# Altium PCB PCB1.PcbDoc
Units mil, origin at the board's own origin, x right, y up, seen from the top; angles counter-clockwise.
Board outline 1968.5 x 3365.35 mil, 2 copper layers (Top Layer, Bottom Layer); 34 components, 44 nets, 152 pads, 34 vias.
Unrouted connection lines stored in the file: 7.
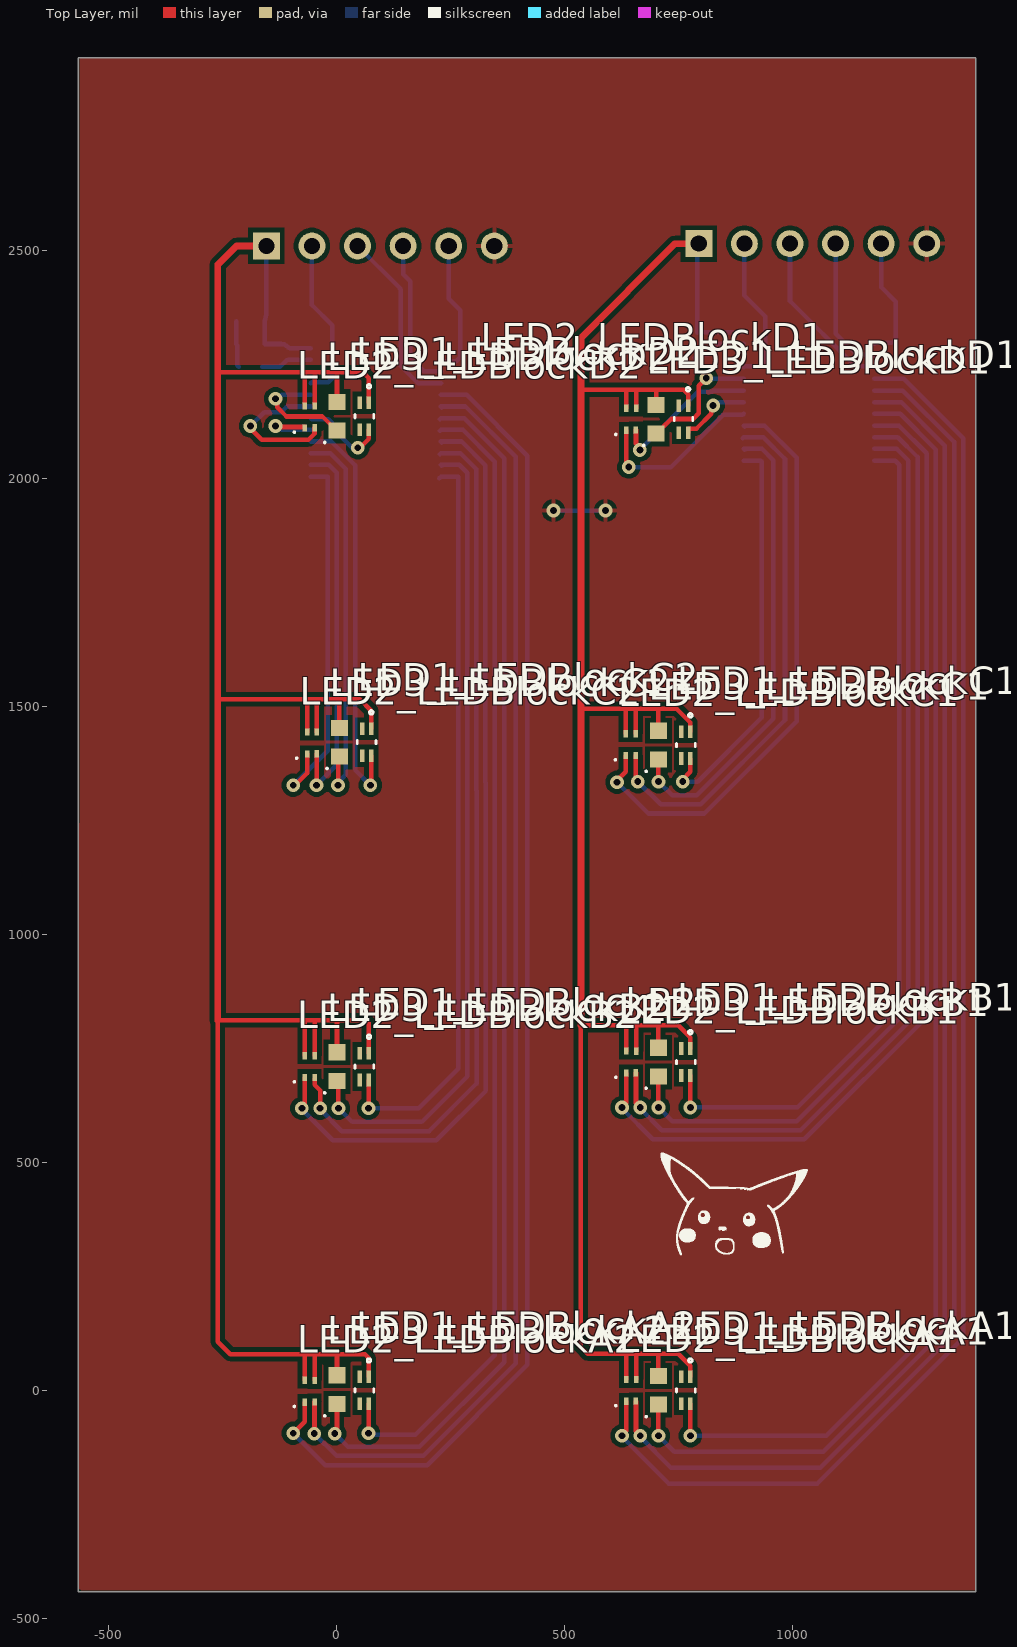
[diagram p0: Top Layer view]
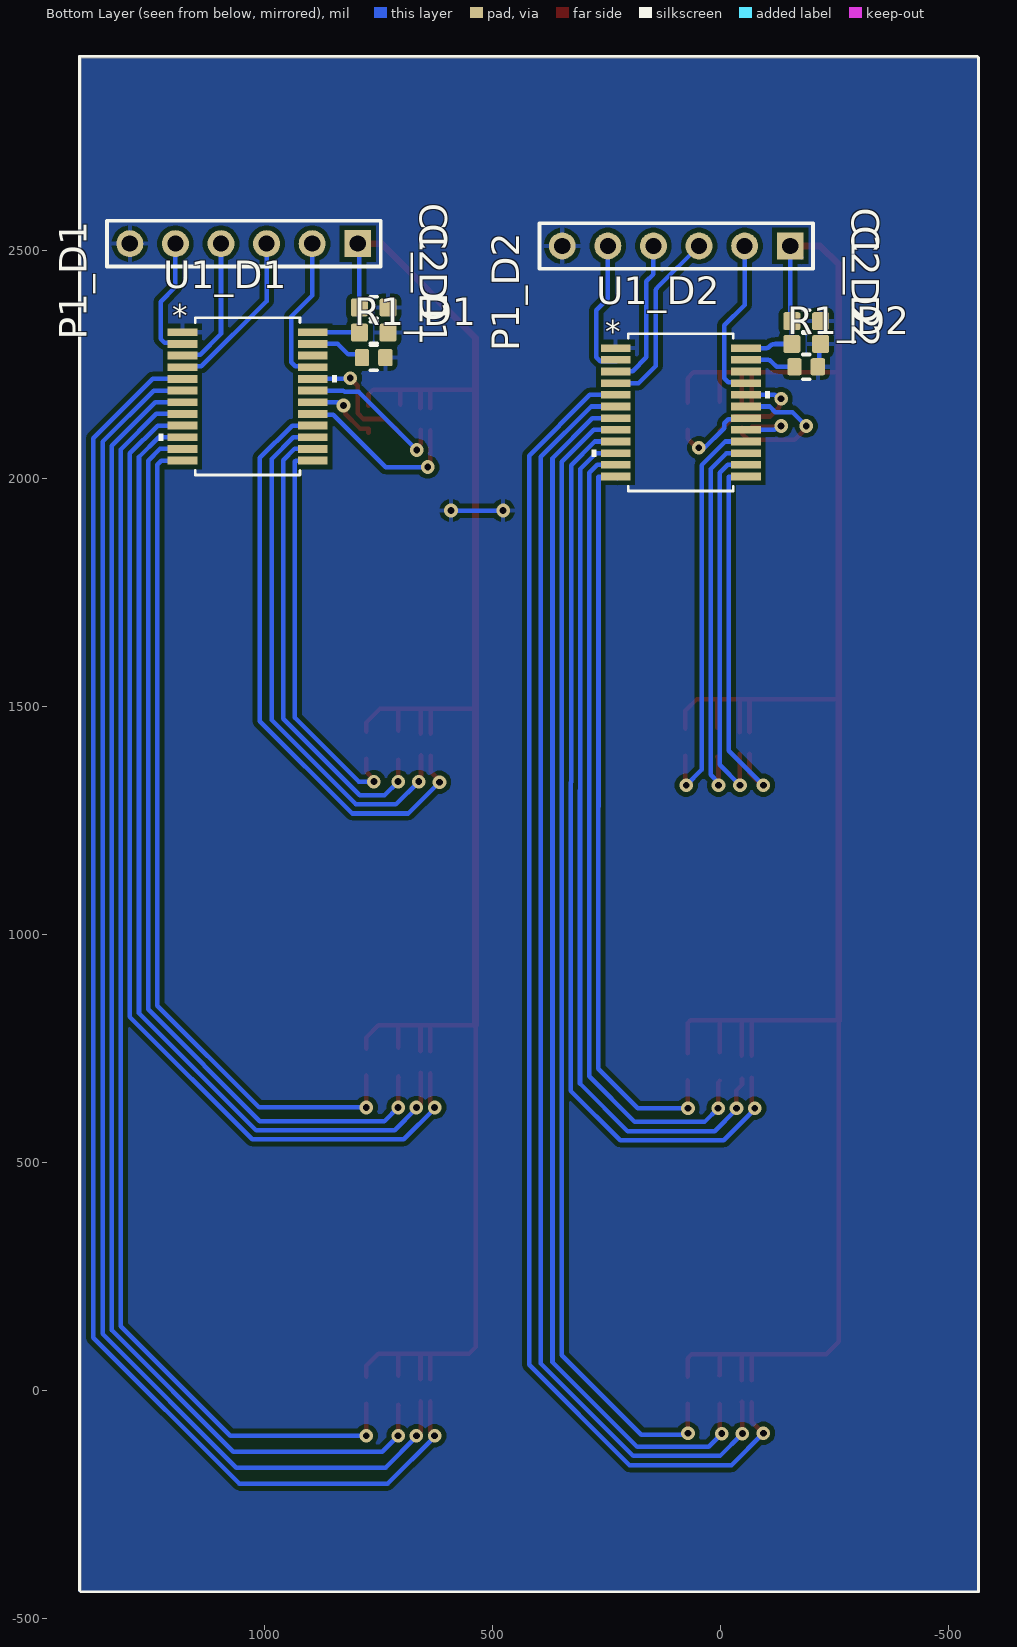
[diagram p1: Bottom Layer view, seen from below]
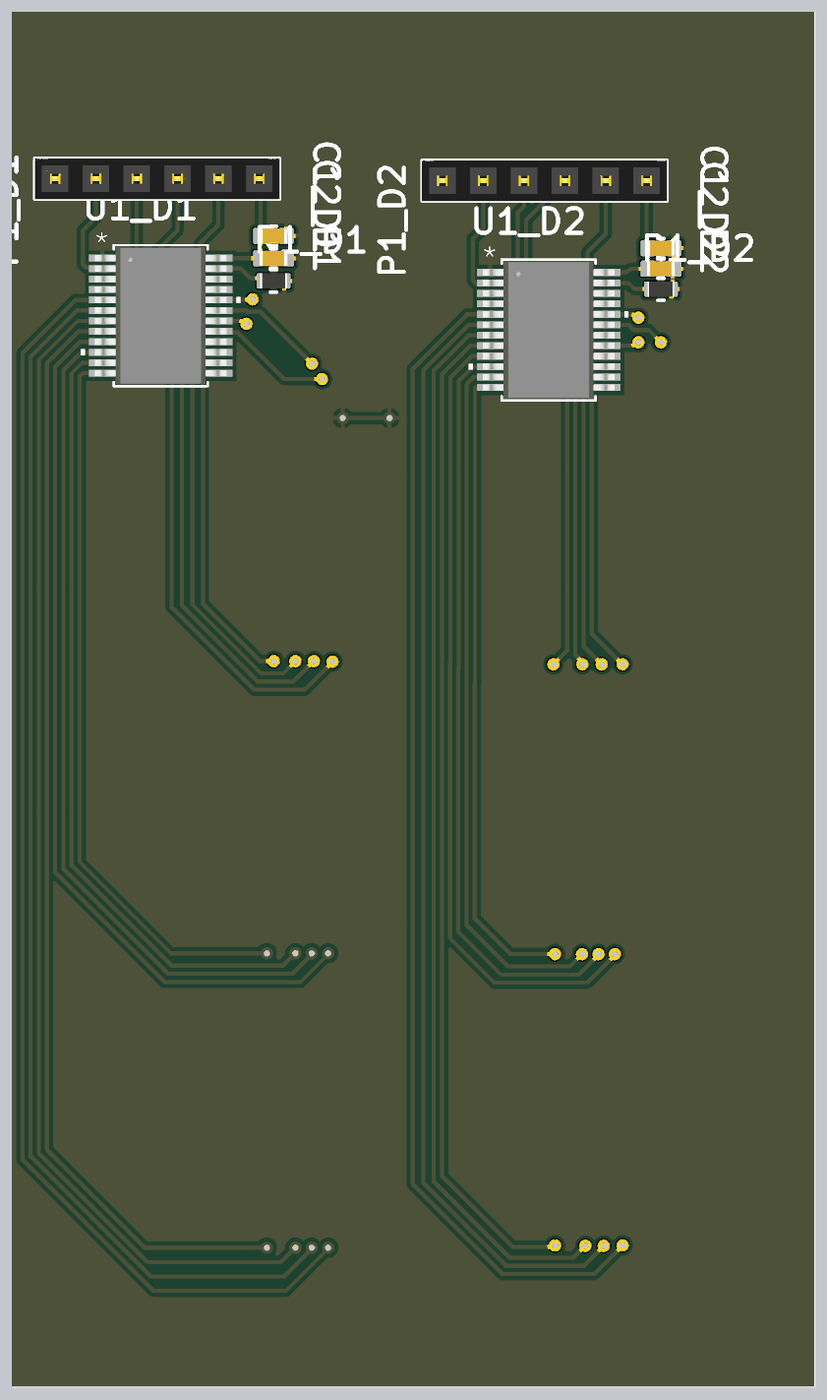
[diagram p2: 3D render of the assembled board from below, using the file's embedded part models]

## Layer stack, top to bottom
Top Solder: solder mask 0.4, Solder Resist, Dk 3.5
Top Layer: signal copper 1.4
Dielectric 1: dielectric 12.6, FR-4, Dk 4.8
Bottom Layer: signal copper 1.4
Bottom Solder: solder mask 0.4, Solder Resist, Dk 3.5

## Board outline
-566.14,-442.52 1402.36,-442.52 1402.36,2922.83 -566.14,2922.83

## Design rules (kind name [scope] priority, off if disabled: settings)
Clearance [All] p1: gap=10 ignorepadtopadclearanceinfootprint=FALSE except(0: Arc-Hole Track-Hole SMDPad-Hole THPad-Hole Via-Hole Fill-Hole Poly-Hole Region-Hole Text-Hole)
PolygonConnect [All] p1: connectstyle=Relief reliefconductorwidth=10 reliefentries=4 polygonreliefangle="90 Angle" airgapwidth=10
RoomDefinition LEDBlockB1 [InComponentClass('LEDBlockB1')] p1: confinementstyle=ConfineIn formatcopy=TRUE lockcomponents=FALSE outline 607.32,-79.45 802.32,-79.45 802.32,80.55 607.32,80.55
RoomDefinition LEDBlockA2 [InComponentClass('LEDBlockA2')] p2: confinementstyle=ConfineIn formatcopy=TRUE lockcomponents=FALSE outline -111.34,-78.46 98.66,-78.46 98.66,81.54 -111.34,81.54
RoomDefinition LEDBlockA1 [InComponentClass('LEDBlockA1')] p3: confinementstyle=ConfineIn formatcopy=TRUE lockcomponents=FALSE outline 607.32,629.21 802.32,629.21 802.32,789.21 607.32,789.21
RoomDefinition LEDBlockB2 [InComponentClass('LEDBlockB2')] p4: confinementstyle=ConfineIn formatcopy=TRUE lockcomponents=FALSE outline -111.34,631.54 98.66,631.54 98.66,791.54 -111.34,791.54
RoomDefinition LEDBlockC2 [InComponentClass('LEDBlockC2')] p5: confinementstyle=ConfineIn formatcopy=TRUE lockcomponents=FALSE outline -106.34,1341.54 103.66,1341.54 103.66,1501.54 -106.34,1501.54
RoomDefinition LEDBlockC1 [InComponentClass('LEDBlockC1')] p6: confinementstyle=ConfineIn formatcopy=TRUE lockcomponents=FALSE outline 607.32,1337.87 802.32,1337.87 802.32,1497.87 607.32,1497.87
RoomDefinition LEDBlockD2 [InComponentClass('LEDBlockD2')] p7: confinementstyle=ConfineIn formatcopy=TRUE lockcomponents=FALSE outline -111.34,2056.54 98.66,2056.54 98.66,2216.54 -111.34,2216.54
RoomDefinition LEDBlockD1 [InComponentClass('LEDBlockD1')] p8: confinementstyle=ConfineIn formatcopy=TRUE lockcomponents=FALSE outline 607.32,2046.54 802.32,2046.54 802.32,2206.54 607.32,2206.54
RoutingVias [All] p1: holewidth=15 width=30 viastyle="Through Hole" minholewidth=6 minwidth=16 maxholewidth=100 maxwidth=100
SolderMaskExpansion [All] p1: expansion=4 istentingtop=FALSE
Width [All] p1: maxlimit=50 minlimit=6 preferedwidth=10 minimp=50.000000 maximp=50.000000 favimp=50.000000
30 further rules are at their usual default settings.

## Classes and differential pairs
component class LEDBlockD2: LED1_LEDBlockD2 LED2_LEDBlockD2 LED3_LEDBlockD2
component class LEDBlockD1: LED1_LEDBlockD1 LED2_LEDBlockD1 LED3_LEDBlockD1
component class LEDBlockC2: LED1_LEDBlockC2 LED2_LEDBlockC2 LED3_LEDBlockC2
component class LEDBlockC1: LED1_LEDBlockC1 LED2_LEDBlockC1 LED3_LEDBlockC1
component class LEDBlockB2: LED1_LEDBlockB2 LED2_LEDBlockB2 LED3_LEDBlockB2
component class LEDBlockA2: LED1_LEDBlockA2 LED2_LEDBlockA2 LED3_LEDBlockA2
channel class LEDBlock: LEDBlockA1 LEDBlockA2 LEDBlockB1 LEDBlockB2 LEDBlockC1 LEDBlockC2 LEDBlockD1 LEDBlockD2
channel class Main: D1 D2
channel class LED: D1 D2
component class D2: C1_D2 C2_D2 P1_D2 R1_D2
component class D1: C1_D1 C2_D1 P1_D1 R1_D1 U1_D1

## Components (designator, comment, footprint, x,y, rotation, side; value= is the part's Value field where it differs from the comment)
C1_D1 "Capacitor" C0603B 760.17,2374.54 r180 bottom value=1u (schematic designator C1)
C1_D2 "Capacitor" C0603B -188.34,2344.54 r180 bottom value=1u (schematic designator C1)
C2_D1 "Capacitor" C0603B 760.17,2319.54 r180 bottom value=0.1u (schematic designator C2)
C2_D2 "Capacitor" C0603B -188.34,2294.54 r180 bottom value=0.1u (schematic designator C2)
LED1_LEDBlockA1 "APHB1608CGKSEKC" APHB1608CGKSEKC_KNB 766.66,-0.46 r270 top (schematic designator LED1)
LED1_LEDBlockA2 "APHB1608CGKSEKC" APHB1608CGKSEKC_KNB 61.66,-0.46 r270 top (schematic designator LED1)
LED1_LEDBlockB1 "APHB1608CGKSEKC" APHB1608CGKSEKC_KNB 766.66,719.54 r270 top (schematic designator LED1)
LED1_LEDBlockB2 "APHB1608CGKSEKC" APHB1608CGKSEKC_KNB 61.66,709.54 r270 top (schematic designator LED1)
LED1_LEDBlockC1 "APHB1608CGKSEKC" APHB1608CGKSEKC_KNB 766.66,1414.54 r270 top (schematic designator LED1)
LED1_LEDBlockC2 "APHB1608CGKSEKC" APHB1608CGKSEKC_KNB 66.66,1421.03 r270 top (schematic designator LED1)
LED1_LEDBlockD1 "APHB1608CGKSEKC" APHB1608CGKSEKC_KNB 761.66,2129.54 r270 top (schematic designator LED1)
LED1_LEDBlockD2 "APHB1608CGKSEKC" APHB1608CGKSEKC_KNB 61.66,2136.03 r270 top (schematic designator LED1)
LED2_LEDBlockA1 "QBLP601-RIB" DFN65P160X55-4N 646.66,-0.46 r90 top (schematic designator LED2)
LED2_LEDBlockA2 "QBLP601-RIB" DFN65P160X55-4N -58.34,-2.47 r90 top (schematic designator LED2)
LED2_LEDBlockB1 "QBLP601-RIB" DFN65P160X55-4N 646.66,719.54 r90 top (schematic designator LED2)
LED2_LEDBlockB2 "QBLP601-RIB" DFN65P160X55-4N -58.34,709.54 r90 top (schematic designator LED2)
LED2_LEDBlockC1 "QBLP601-RIB" DFN65P160X55-4N 645.76,1415.7 r90 top (schematic designator LED2)
LED2_LEDBlockC2 "QBLP601-RIB" DFN65P160X55-4N -53.34,1419.54 r90 top (schematic designator LED2)
LED2_LEDBlockD1 "QBLP601-RIB" DFN65P160X55-4N 646.66,2129.54 r90 top (schematic designator LED2)
LED2_LEDBlockD2 "QBLP601-RIB" DFN65P160X55-4N -58.34,2134.54 r90 top (schematic designator LED2)
LED3_LEDBlockA1 "B18W1IRP-A1C0001X4U1930" CAPCP1608X10N 706.66,-0.46 r90 top (schematic designator LED3)
LED3_LEDBlockA2 "B18W1IRP-A1C0001X4U1930" CAPCP1608X10N 1.66,1.03 r90 top (schematic designator LED3)
LED3_LEDBlockB1 "B18W1IRP-A1C0001X4U1930" CAPCP1608X10N 706.66,719.54 r90 top (schematic designator LED3)
LED3_LEDBlockB2 "B18W1IRP-A1C0001X4U1930" CAPCP1608X10N 1.66,709.54 r90 top (schematic designator LED3)
LED3_LEDBlockC1 "B18W1IRP-A1C0001X4U1930" CAPCP1608X10N 706.66,1414.54 r90 top (schematic designator LED3)
LED3_LEDBlockC2 "B18W1IRP-A1C0001X4U1930" CAPCP1608X10N 6.66,1421.03 r90 top (schematic designator LED3)
LED3_LEDBlockD1 "B18W1IRP-A1C0001X4U1930" CAPCP1608X10N 701.66,2129.54 r90 top (schematic designator LED3)
LED3_LEDBlockD2 "B18W1IRP-A1C0001X4U1930" CAPCP1608X10N 1.66,2136.03 r90 top (schematic designator LED3)
P1_D1 "Header 6" HDR1X6 795.17,2514.54 r0 bottom (schematic designator P1)
P1_D2 "Header 6" HDR1X6 -153.34,2509.54 r0 bottom (schematic designator P1)
R1_D1 "Resistor" R0603B 760.17,2264.54 r180 bottom value=2k (schematic designator R1)
R1_D2 "Resistor" R0603B -188.34,2244.54 r180 bottom value=2k (schematic designator R1)
U1_D1 "IS31FL3726A-SALS4-TR" SSOP-24_LMS 1036.66,2179.54 r180 bottom (schematic designator U1)
U1_D2 "IS31FL3726A-SALS4-TR" SSOP-24_LMS 86.66,2144.54 r180 bottom (schematic designator U1)

## Footprints (in the part's own frame and the unit in brackets; to place one, negate y for a bottom-side part, rotate by r counter-clockwise, add the part's x,y. Pads: shape width x height; smd on the part's side, far side on the other; paste and mask are expansions set on the pad)
APHB1608CGKSEKC_KNB [mil]
  rect 28x10 smd paste+0 mask+0: 1(-29.5,10) 2(29.5,10) 3(-29.5,-10) 4(29.5,-10)
  silkscreen extent -69,-20 4,20, body extent -31,-16 31,16, height 32
C0603B [mm] "Chip Capacitor, 0603, 2-Leads, Body 1.60x0.80mm, IPC Medium Density"
  rrect25% 0.95x1 smd: 1(-0.8,0) 2(0.8,0)
  silkscreen extent -0.2,-0.6 0.2,0.6, body extent -0.87,-0.48 0.87,0.48, height 0.87
CAPCP1608X10N [mm] "Chip Capacitor, 2-Leads, Body 1.60x0.80mm, IPC Medium Density"
  rect 0.9x0.95 smd: 1(-0.8,0) 2(0.8,0)
  silkscreen extent -1.51,0.64 -1.41,0.74, body extent -0.85,-0.45 0.85,0.45, height 0.95
DFN65P160X55-4N [mm] "DFN, 4-Leads, Body 0.80x1.60mm, Pitch 0.65mm, IPC Medium Density"
  rect 0.4x0.25 smd: 1(0.608,0.272) 2(0.605,-0.277) 3(-0.612,0.272) 4(-0.6,-0.272)
  silkscreen extent -0.9,0.8 -0.8,0.9, body extent -0.85,-0.45 0.85,0.45, height 0.55
HDR1X6 [mm] "Connector; Header; 6 Position"
  rect 1.5x1.5 hole 0.9: 1(0,0)
  round 1.5 hole 0.9: 2(2.54,0) 3(5.08,0) 4(7.62,0) 5(10.16,0) 6(12.7,0)
  silkscreen extent -1.27,-1.27 13.97,1.27, body extent -1.27,-1.27 13.97,1.27, height 8.89
R0603B [mm] "Chip Resistor, 0603, 2-Leads, Body 1.58x0.85mm, IPC Medium Density"
  rrect25% 0.8x0.95 smd: 1(-0.65,0) 2(0.65,0)
  silkscreen extent -0.2,-0.7 0.2,0.7, body extent -0.82,-0.48 0.82,0.48, height 0.5
SSOP-24_LMS [mil]
  rect 65x17 smd paste+0 mask+0: 1(-143,140.75) 2(-143,115.16) 3(-143,89.57) 4(-143,63.98) 5(-143,38.39) 6(-143,12.8) 7(-143,-12.8) 8(-143,-38.39) 9(-143,-63.98) 10(-143,-89.57) 11(-143,-115.16) 12(-143,-140.75) 13(143,-140.75) 14(143,-115.16) 15(143,-89.57) 16(143,-63.98) 17(143,-38.39) 18(143,-12.8) 19(143,12.8) 20(143,38.39) 21(143,63.98) 22(143,89.57) 23(143,115.16) 24(143,140.75)
  silkscreen extent -196,-172 196,172, body extent -161,-167 161,167, height 79

## Part data
C1_D1 C1_D2 C2_D1 C2_D2: library part CMP-001-00000-10, "Non-polarized capacitor"
LED1_LEDBlockA1 LED1_LEDBlockA2 LED1_LEDBlockB1 LED1_LEDBlockB2 LED1_LEDBlockC1 LED1_LEDBlockC2 LED1_LEDBlockD1 LED1_LEDBlockD2: library part CMP-007-00006-3, "Dual Color LED, Super Bright Orange/green, Water Clear, 1.6mm", Mfr_Name=Kingbright, Design Item ID=APHB1608CGKSEKC, RoHS Compliant=Yes, Source=APHB1608CGKSEKC.SchLib
LED2_LEDBlockA1 LED2_LEDBlockA2 LED2_LEDBlockB1 LED2_LEDBlockB2 LED2_LEDBlockC1 LED2_LEDBlockC2 LED2_LEDBlockD1 LED2_LEDBlockD2: library part CMP-007-00009-2, "Blue, Red 470nm Blue, 630nm Red LED Indication - Discrete 3.1V Blue, 2V Red 0603 (1608 Metric)"
LED3_LEDBlockA1 LED3_LEDBlockA2 LED3_LEDBlockB1 LED3_LEDBlockB2 LED3_LEDBlockC1 LED3_LEDBlockC2 LED3_LEDBlockD1 LED3_LEDBlockD2: library part CMP-007-00008-2, "Infrared (IR) Emitter 850nm 1.7V 100mA 23mW/sr @ 100mA (Typ) 80° 0603 (1608 Metric)"
P1_D1 P1_D2: library part CMP-005-000107-2, "Header, 6-Pin", Component Type=Standard, Design Item ID="Header 6", LatestRevisionDate=17-Jul-2002, LatestRevisionNote="Re-released for DXP Platform.", Pin Count=6, Publisher="Altium Limited", Source="Miscellaneous Connectors.SchLib"
R1_D1 R1_D2: library part CMP-009-00002-14
U1_D1 U1_D2: library part CMP-184-000001-2, "LED Driver IC 16 Output Linear Shift Register No Dimming 25.2mA 24-eTSSOP", Mfr_Name="Lumissil Microsystems", Design Item ID=IS31FL3726A-SALS4-TR, RefDes=RefDes, Source=IS31FL3726A-SALS4-TR.SchLib, Type=Type

## Via types
v1: diameter 30, hole 15, Top Layer to Bottom Layer, 24 vias
v2: diameter 30, hole 15, Top Layer to Bottom Layer, tented both sides, 10 vias

## Nets (pads, with @x,y where several pads share a name; then routed paths per layer and width w, separated by ;. In a path a pad name is that pad's centre, name@x,y a point inside that pad or via, vN(x,y) a via of type N, cw(c..) or ccw(c..) an arc to the next point about the centre after c; other vN are vias at no path point)
+3.3: C1_D1.1 C1_D2.1 C2_D1.1 C2_D2.1 LED1_LEDBlockA1.1 LED1_LEDBlockA2.1 LED1_LEDBlockB1.1 LED1_LEDBlockB2.1 LED1_LEDBlockC1.1 LED1_LEDBlockC2.1 LED1_LEDBlockD1.1 LED1_LEDBlockD2.1 LED2_LEDBlockA1.1 LED2_LEDBlockA1.2 LED2_LEDBlockA2.1 LED2_LEDBlockA2.2 LED2_LEDBlockB1.1 LED2_LEDBlockB1.2 LED2_LEDBlockB2.1 LED2_LEDBlockB2.2 LED2_LEDBlockC1.1 LED2_LEDBlockC1.2 LED2_LEDBlockC2.1 LED2_LEDBlockC2.2 LED2_LEDBlockD1.1 LED2_LEDBlockD1.2 LED2_LEDBlockD2.1 LED2_LEDBlockD2.2 LED3_LEDBlockA1.2 LED3_LEDBlockA2.2 LED3_LEDBlockB1.2 LED3_LEDBlockB2.2 LED3_LEDBlockC1.2 LED3_LEDBlockC2.2 LED3_LEDBlockD1.2 LED3_LEDBlockD2.2 P1_D1.1 P1_D2.1 U1_D1.24 U1_D2.24 | length 9807.9
  Top Layer w10: -259.84,1515.75 -66.93,1515.75 ; -259.84,2232.28 -70.87,2232.28 ; P1_D2.1@-175.97,2486.9 P1_D2.1 ; LED2_LEDBlockA2.1 -69.06,76.93 -70.87,78.74 ; LED2_LEDBlockB2.1 -69.06,811.02 ; LED2_LEDBlockD2.1 -69.06,2230.48 -70.87,2232.28 ; LED2_LEDBlockC2.1 -64.06,1512.88 -66.93,1515.75 ; LED2_LEDBlockA2.2 -47.43,78.55 0,78.55 ; -47.43,78.74 -70.87,78.74 ; LED2_LEDBlockB2.2 -47.43,811.02 ; LED2_LEDBlockD2.2@-47.36,2161.24 -47.36,2232.28 ; LED2_LEDBlockC2.2 -42.43,1512.69 -45.5,1515.75 ; LED3_LEDBlockB2.2 1.66,811.02 ; LED3_LEDBlockD2.2 1.66,2232.28 ; LED3_LEDBlockA2.2@2.65,32.53 LED3_LEDBlockA2.2 1.66,76.89 0,78.55 ; LED3_LEDBlockC2.2 6.66,1510.6 1.51,1515.75 ; LED1_LEDBlockA2.1 71.66,69.97 63.08,78.55 0,78.55 ; LED1_LEDBlockB2.1 71.66,805.17 65.8,811.02 1.66,811.02 ; LED1_LEDBlockD2.1 71.66,2219.68 59.05,2232.28 1.66,2232.28 ; LED1_LEDBlockC2.1 76.66,1490.27 51.18,1515.75 1.51,1515.75 ; 536.66,1494.54 633.86,1494.54 ; 536.66,2194.54 635.94,2194.54 ; LED2_LEDBlockC1.1@635.09,1439.59 LED2_LEDBlockC1.1 635.04,1493.36 633.86,1494.54 ; LED2_LEDBlockA1.1 635.94,79.06 635,80 ; LED2_LEDBlockB1.1 635.94,799.06 635,800 ; LED2_LEDBlockD1.1@635.99,2153.42 LED2_LEDBlockD1.1 635.94,2194.54 ; LED2_LEDBlockC1.2 LED2_LEDBlockC1.2 656.66,1493.72 657.48,1494.54 ; LED2_LEDBlockA1.2 657.57,77.57 660,80 ; LED2_LEDBlockB1.2 657.57,797.57 660,800 ; LED2_LEDBlockD1.2 657.57,2194.54 ; LED3_LEDBlockD1.2 701.66,2194.54 ; LED3_LEDBlockA1.2 706.66,78.34 705,80 ; LED3_LEDBlockB1.2 706.66,798.34 705,800 ; LED3_LEDBlockC1.2 706.66,1492.6 704.72,1494.54 ; LED1_LEDBlockD1.1 771.66,2184.54 761.66,2194.54 701.66,2194.54 ; LED1_LEDBlockA1.1 776.66,53.34 750,80 705,80 ; LED1_LEDBlockB1.1 776.66,773.34 750,800 705,800 ; LED1_LEDBlockC1.1 776.66,1464.25 746.37,1494.54 704.72,1494.54 ; -70.87,78.74 -232.28,78.74 -259.84,106.3 -259.84,811.02 -69.06,811.02 ; -70.87,2232.28 -47.36,2232.28 ; -69.06,811.02 -47.43,811.02 ; -66.93,1515.75 -45.5,1515.75 ; -47.43,811.02 1.66,811.02 ; -47.36,2232.28 1.66,2232.28 ; -45.5,1515.75 1.51,1515.75 ; 633.86,1494.54 657.48,1494.54 ; 635,80 660,80 ; 635,80 551.2,80 536.66,94.54 536.66,800 635,800 ; 635,800 660,800 ; 635.94,2194.54 657.57,2194.54 ; 657.48,1494.54 704.72,1494.54 ; 657.57,2194.54 701.66,2194.54 ; 660,80 705,80 ; 660,800 705,800
  Top Layer w15: -259.84,811.02 -259.84,1515.75 -259.84,2232.28 -259.84,2468.5 -218.81,2509.54 P1_D2.1 ; 536.66,800 536.66,1494.54 536.66,2194.54 536.66,2308.06 743.14,2514.54 P1_D1.1
  Bottom Layer w10: P1_D2.1@-177.87,2485.01 -163.57,2499.31 -163.57,2509.54 P1_D2.1 -153.34,2359.22 C1_D2.1 ; C1_D2.1 C2_D2.1 -120.45,2294.54 cw(c-120.41,2277.46) -108.3,2289.49 -107.02,2288.21 ccw(c-99.94,2295.28) -99.99,2285.28 U1_D2.24 ; P1_D1.1 791.66,2511.03 C1_D1.1 C2_D1.1 792.41,2320.28 U1_D1.24
ENABLE_D1: P1_D1.2 U1_D1.21 | length 331.2
  Bottom Layer w10: U1_D1.21 895.75,2245.6 932.37,2245.6 941.16,2254.39 941.16,2354.83 895.17,2400.82 P1_D1.2
ENABLE_D2: P1_D2.2 U1_D2.21 | length 360.6
  Bottom Layer w10: U1_D2.21 -54.25,2210.6 -17.63,2210.6 -8.84,2219.39 -8.84,2335.58 -53.34,2380.08 P1_D2.2
GND: C1_D1.2 C1_D2.2 C2_D1.2 C2_D2.2 P1_D1.6 P1_D2.6 R1_D1.2 R1_D2.2 U1_D1.1 U1_D2.1 | length 220.6
  Bottom Layer w10: C1_D2.2 C2_D2.2 -216.88,2291.58 -216.88,2247.49 R1_D2.2 ; v2@472.44,1929.13 v2(590.55,1929.13)
  other v2: 476.38,1929.13
LATCH_D1: P1_D1.3 U1_D1.4 | length 370.5
  Bottom Layer w10: P1_D1.3 995.17,2388.69 1138.26,2245.6 1177.57,2245.6 U1_D1.4
LATCH_D2: P1_D2.3 U1_D2.4 | length 405.8
  Bottom Layer w10: P1_D2.3 138.73,2417.46 cw(c131.66,2410.39) 141.66,2410.39 141.66,2246.23 179.38,2208.51 U1_D2.4
NetR1_D1_1: R1_D1.1 U1_D1.23 | length 120.4
  Bottom Layer w10: R1_D1.1 792.86,2271.64 816.5,2271.64 839.56,2294.69 U1_D1.23
NetR1_D2_1: R1_D2.1 U1_D2.23 | length 111.8
  Bottom Layer w10: R1_D2.1 -127.48,2244.54 ccw(c-127.48,2254.54) -120.43,2247.44 -111.09,2256.78 cw(c-104.04,2249.69) -104.08,2259.69 ; -104.04,2259.69 U1_D2.23
OUT0_D1: LED2_LEDBlockA1.3 U1_D1.5 | length 3227.1
  Top Layer w10: v2(626.66,-100) 635.94,-90.71 LED2_LEDBlockA1.3
  Bottom Layer w10: v2(626.66,-100) 626.66,-102.43 729.23,-205 1054.85,-205 1375,115.15 1375,2087.99 1245.07,2217.92 U1_D1.5
OUT0_D2: LED2_LEDBlockA2.3 U1_D2.5 | length 2951.2
  Top Layer w10: v1(-94.49,-94.49) -69.06,-69.06 LED2_LEDBlockA2.3
  Bottom Layer w10: v1(-94.49,-94.49) -24.49,-164.49 199.17,-164.49 419.29,55.64 419.29,2049.65 286.02,2182.92 U1_D2.5
out1_D1: LED1_LEDBlockA1.2 U1_D1.8 | length 2798.6
  Top Layer w10: v2(776.66,-100) LED1_LEDBlockA1.2
  Bottom Layer w10: v2(776.66,-100) 1075,-100 1315,140 1315,2063.14 1236.99,2141.15 U1_D1.8
out1_D2: LED1_LEDBlockA2.2 U1_D2.8 | length 2525.5
  Top Layer w10: v1(70.87,-94.49) 71.66,-93.69 LED1_LEDBlockA2.2
  Bottom Layer w10: v1(70.87,-94.49) 74.36,-97.98 173.67,-97.98 347.72,76.06 347.72,2036.37 277.94,2106.15 U1_D2.8 ; 229.66,2157.33 231.75,2155.24
OUT2_D1: LED2_LEDBlockA1.4 U1_D1.6 | length 3098.3
  Top Layer w10: LED2_LEDBlockA1.4 657.37,-90.71 v2(666.66,-100)
  Bottom Layer w10: v2(666.66,-100) 666.66,-102.42 734.24,-170 1061.57,-170 1355,123.43 1355,2079.71 1242.37,2192.33 U1_D1.6
OUT2_D2: LED2_LEDBlockA2.4 U1_D2.6 | length 2817.4
  Top Layer w10: v1(-48.34,-95.46) -47.71,-94.84 -47.71,-26.16 LED2_LEDBlockA2.4
  Bottom Layer w10: v1(-48.34,-95.46) 0.69,-144.49 190.88,-144.49 393.7,58.33 393.7,2046.95 283.32,2157.33 U1_D2.6 ; 227.57,2129.65 229.66,2131.74
OUT3_D1: LED3_LEDBlockA1.1 U1_D1.7 | length 2958.2
  Top Layer w10: LED3_LEDBlockA1.1@705,-33.62 LED3_LEDBlockA1.1 v2(706.66,-100)
  Bottom Layer w10: v2(706.66,-100) 741.66,-135 1068.28,-135 1335,131.72 1335,2071.42 1239.68,2166.74 U1_D1.7
OUT3_D2: LED3_LEDBlockA2.1 U1_D2.7 | length 2688.3
  Top Layer w10: v1(-3.34,-95.46) 1.66,-90.46 LED3_LEDBlockA2.1
  Bottom Layer w10: v1(-3.34,-95.46) 25.69,-124.49 182.6,-124.49 368.11,61.02 368.11,2044.26 280.63,2131.74 U1_D2.7 ; 227.57,2104.06 229.66,2106.15
OUT4_D1: LED2_LEDBlockB1.3 U1_D1.9 | length 2266.1
  Top Layer w10: v2(626.66,620) 635.94,629.29 LED2_LEDBlockB1.3
  Bottom Layer w10: v2(626.66,620) 626.66,617.57 694.23,550 1026.57,550 1295,818.43 1295,2054.85 1234.29,2115.56 U1_D1.9
OUT4_D2: LED2_LEDBlockB2.3 U1_D2.9 | length 2043
  Top Layer w10: v1(-75.43,618.11) -75.43,622.89 -69.06,629.27 LED2_LEDBlockB2.3
  Bottom Layer w10: v1(-75.43,618.11) -75.43,615.68 -7.86,548.11 219.67,548.11 327.72,656.15 327.72,1333.26 327.16,1333.81 327.16,2028.64 275.24,2080.56 U1_D2.9 U1_D2.9@231.75,2078.47
OUT5_D1: LED1_LEDBlockB1.2 U1_D1.12 | length 1866.6
  Top Layer w10: v2(776.66,620) LED1_LEDBlockB1.2
  Bottom Layer w10: v2(776.66,620) 1011.72,620 1235,843.28 1235,2030 1226.21,2038.79 U1_D1.12
OUT5_D2: LED1_LEDBlockB2.2 U1_D2.12 | length 1634.7
  Top Layer w10: v1(70.87,618.11) 71.66,618.91 LED1_LEDBlockB2.2
  Bottom Layer w10: v1(70.87,618.11) 181.1,618.11 267.72,704.72 267.72,1279.53 267.16,1280.08 267.16,2003.79 U1_D2.12 ; 227.57,2052.88 229.66,2054.97
OUT6_D1: LED2_LEDBlockB1.4 U1_D1.10 | length 2149.8
  Top Layer w10: LED2_LEDBlockB1.4 657.37,629.29 v2(666.66,620)
  Bottom Layer w10: v2(666.66,620) 666.66,617.58 714.24,570 1018.28,570 1275,826.72 1275,2046.57 1231.6,2089.97 U1_D1.10
OUT6_D2: LED2_LEDBlockB2.4 U1_D2.10 | length 1921.7
  Top Layer w10: LED2_LEDBlockB2.4@-47.62,683.06 -47.62,669.69 -35.02,657.09 -35.02,618.52 v1(-35.43,618.11)
  Bottom Layer w10: v1(-35.43,618.11) -35.43,615.82 12.28,568.11 203.48,568.11 307.72,672.34 307.72,1315.16 307.16,1315.72 307.16,2020.36 272.55,2054.97 U1_D2.10 ; 229.66,2029.38 231.75,2027.29
OUT7_D1: LED3_LEDBlockB1.1 U1_D1.11 | length 2022.1
  Top Layer w10: LED3_LEDBlockB1.1@705,686.38 LED3_LEDBlockB1.1 v2(706.66,620)
  Bottom Layer w10: v2(706.66,620) 736.66,590 1010,590 1255,835 1255,2038.28 1228.91,2064.38 U1_D1.11
OUT7_D2: LED3_LEDBlockB2.1 U1_D2.11 | length 1791.6
  Top Layer w10: LED3_LEDBlockB2.1 4.79,674.91 v1(4.79,618.02)
  Bottom Layer w10: v1(4.79,618.02) 34.7,588.11 187.29,588.11 287.72,688.53 287.72,1297.07 287.16,1297.62 287.16,2012.07 269.86,2029.38 U1_D2.11 ; 226.16,2000.29 229.66,2003.79
OUT8_D1: LED2_LEDBlockC1.3 U1_D1.16 | length 1298.8
  Top Layer w10: v1(615.82,1333.34) 615.82,1337.34 635.04,1356.56 LED2_LEDBlockC1.3
  Bottom Layer w10: v1(615.82,1333.34) 684.52,1264.65 807.43,1264.65 1009.84,1467.05 1009.84,2044.96 939.24,2115.56 U1_D1.16 U1_D1.16@895.75,2113.47
OUT8_D2: LED2_LEDBlockC2.3 U1_D2.13 | length 829.4
  Top Layer w10: v1(-94.49,1326.77) -90.55,1326.77 -64.06,1353.26 LED2_LEDBlockC2.3
  Bottom Layer w10: v1(-94.49,1326.77) -18.84,1402.42 -18.84,2003.79 U1_D2.13
OUT9_D1: LED1_LEDBlockC1.2 U1_D1.13 | length 890.7
  Top Layer w10: v1(759.84,1334.65) 759.84,1339.22 776.66,1356.04 LED1_LEDBlockC1.2
  Bottom Layer w10: v1(759.84,1334.65) 792.58,1334.65 933.07,1475.14 933.07,2036.88 931.16,2038.79 U1_D1.13
OUT9_D2: LED1_LEDBlockC2.2 U1_D2.16 | length 900.3
  Top Layer w10: v1(74.8,1326.77) 76.66,1328.63 LED1_LEDBlockC2.2
  Bottom Layer w10: U1_D2.16 -10.76,2080.56 41.16,2028.64 41.16,1360.41 v1(74.8,1326.77)
OUT10_D1: LED2_LEDBlockC1.4 U1_D1.15 | length 1165.6
  Top Layer w10: LED2_LEDBlockC1.4 656.46,1345.01 661.42,1340.06 v1(661.42,1334.65)
  Bottom Layer w10: v1(661.42,1334.65) 711.42,1284.65 799.15,1284.65 984.25,1469.75 984.25,2042.26 936.55,2089.97 U1_D1.15 U1_D1.15@891.57,2087.88
OUT10_D2: LED2_LEDBlockC2.4 U1_D2.14 | length 837.8
  Top Layer w10: v1(-43.31,1326.77) -42.71,1327.37 -42.71,1395.85 LED2_LEDBlockC2.4
  Bottom Layer w10: U1_D2.14 -16.14,2029.38 1.16,2012.07 1.16,1371.24 v1(-43.31,1326.77)
OUT11_D1: LED3_LEDBlockC1.1 U1_D1.14 | length 1027.7
  Top Layer w10: v1(706.69,1334.54) LED3_LEDBlockC1.1@706.69,1383.01
  Bottom Layer w10: v1(706.69,1334.54) 736.58,1304.65 790.87,1304.65 958.66,1472.44 958.66,2039.57 933.86,2064.38 U1_D1.14 U1_D1.14@895.75,2062.29
OUT11_D2: LED3_LEDBlockC2.1 U1_D2.15 | length 856.4
  Top Layer w10: v1(3.94,1326.77) 3.94,1386.81 LED3_LEDBlockC2.1
  Bottom Layer w10: U1_D2.15 -13.45,2054.97 21.16,2020.36 21.16,1349.41 3.94,1332.18 v1(3.94,1326.77)
OUT12_D1: LED2_LEDBlockD1.3 U1_D1.17 | length 383.6
  Top Layer w10: LED2_LEDBlockD1.3 635.94,2035.67 641.66,2029.95 v1(641.66,2024.54)
  Bottom Layer w10: v1(641.66,2024.54) 734.09,2024.54 848.61,2139.06 891.57,2139.06 U1_D1.17
OUT12_D2: LED2_LEDBlockD2.3 U1_D2.17 | length 147.6
  Top Layer w10: v1(-133.34,2114.54) -131.29,2112.49 -69.14,2112.49 -69.06,2112.41 LED2_LEDBlockD2.3
  Bottom Layer w10: v1(-133.34,2114.54) -127.93,2114.54 -119.54,2106.15 U1_D2.17
OUT13_D1: LED1_LEDBlockD1.2 U1_D1.18 | length 163.1
  Top Layer w10: LED1_LEDBlockD1.2 771.66,2109.04 790.16,2109.04 822.83,2141.71 822.83,2155.71 v1(826.66,2159.54)
  Bottom Layer w10: v1(826.66,2159.54) 832.07,2159.54 839.28,2166.74 U1_D1.18
OUT13_D2: LED1_LEDBlockD2.2 U1_D2.18 | length 206.5
  Top Layer w10: v1(47.24,2066.93) 47.24,2065.04 43.31,2061.11 46.45,2061.11 71.66,2086.32 LED1_LEDBlockD2.2
  Bottom Layer w10: U1_D2.18 -54.25,2129.65 -17.63,2129.65 -8.34,2120.36 -8.34,2109.54 38.21,2062.99 42.15,2066.93 v1(47.24,2066.93)
OUT14_D1: LED2_LEDBlockD1.4 U1_D1.19 | length 329.2
  Top Layer w10: LED2_LEDBlockD1.4 657.37,2075.99 665.94,2067.42 v1(665.94,2062.01)
  Bottom Layer w10: v1(665.94,2062.01) 793.47,2189.54 824.09,2189.54 826.88,2192.33 U1_D1.19
OUT14_D2: LED2_LEDBlockD2.4 U1_D2.19 | length 324.4
  Top Layer w10: v1(-188.34,2114.54) -188.34,2109.54 -163.34,2084.54 -60.95,2084.54 -47.71,2097.78 -47.71,2110.85 LED2_LEDBlockD2.4
  Bottom Layer w10: v1(-188.34,2114.54) -158.34,2144.54 -120.91,2144.54 -108.12,2157.33 U1_D2.19
OUT15_D1: LED3_LEDBlockD1.1 U1_D1.20 | length 278.6
  Top Layer w10: LED3_LEDBlockD1.1 714.38,2110.76 715.36,2110.76 734.64,2130.04 782.87,2130.04 795.35,2142.52 795.35,2203.23 v1(811.66,2219.54)
  Bottom Layer w10: v1(811.66,2219.54) 812.47,2218.73 892.85,2218.73 U1_D1.20
OUT15_D2: LED3_LEDBlockD2.1 U1_D2.20 | length 253.3
  Top Layer w10: v1(-133.34,2174.54) -129.63,2170.82 -129.63,2155.82 -109.3,2135.5 -30.28,2135.5 0.68,2104.54 LED3_LEDBlockD2.1
  Bottom Layer w10: v1(-133.34,2174.54) -127.93,2174.54 -119.54,2182.92 U1_D2.20
SCL_D1: P1_D1.4 U1_D1.3 | length 301.9
  Bottom Layer w10: P1_D1.4 1095.17,2316.98 1140.95,2271.19 1177.57,2271.19 U1_D1.3
SCL_D2: P1_D2.4 U1_D2.3 | length 331.3
  Bottom Layer w10: P1_D2.4 146.66,2447.75 162.09,2432.32 162.09,2265.05 192.16,2234.98 228.78,2234.98 U1_D2.3
SDA_D1: P1_D1.5 U1_D1.2 | length 274.2
  Bottom Layer w10: U1_D1.2 1181.75,2296.78 1218.37,2296.78 1227.16,2305.57 1227.16,2387.42 1195.17,2419.41 P1_D1.5
SDA_D2: P1_D2.5 U1_D2.2 | length 316.9
  Bottom Layer w10: U1_D2.2@226.75,2256.78 263.37,2256.78 272.16,2265.57 272.16,2368.17 246.66,2393.67 P1_D2.5 P1_D2.5@246.66,2522.81
pads on no net: LED1_LEDBlockA1.3 LED1_LEDBlockA1.4 LED1_LEDBlockA2.3 LED1_LEDBlockA2.4 LED1_LEDBlockB1.3 LED1_LEDBlockB1.4 LED1_LEDBlockB2.3 LED1_LEDBlockB2.4 LED1_LEDBlockC1.3 LED1_LEDBlockC1.4 LED1_LEDBlockC2.3 LED1_LEDBlockC2.4 LED1_LEDBlockD1.3 LED1_LEDBlockD1.4 LED1_LEDBlockD2.3 LED1_LEDBlockD2.4 U1_D1.22 U1_D2.22

## Polygon pours and split planes (outlines as drawn)
GND on Top Layer "GND_L01_P002" (solid, pour order 2): -563.15,2923.11 -563,2922.96 1402.48,2922.96 1402.48,-439.42 1402.5,-439.44 -563.4,-439.44 -563.4,-439.53
GND on Bottom Layer "GND_L02_P001" (solid, remove dead copper, pour order 1): -563.17,2923.62 1408.49,2923.62 1408.49,-442.52 -563.17,-442.52

## Silkscreen, mask and mechanical layers (free items; w line width, h text height)
Top Overlay:
  drawing of 7 lines, arcs and shapes, not listed
Bottom Overlay:
  lines w6: -566.14,2922.83 -566.14,-442.52 1402.36,-442.52 ; -563.14,2925.83 1405.36,2925.83 1405.36,-439.52
Mechanical 2:
  circle w10: c708.66,354.33 r140.75
  circle w10: c708.66,708.66 r140.75
  circle w10: c708.66,0 r140.75
  circle w10: c354.33,354.33 r140.75
  circle w10: c354.33,708.66 r140.75
  circle w10: c354.33,1417.32 r140.75
  circle w10: c354.33,1771.65 r140.75
  circle w10: c354.33,2125.98 r140.75
  circle w10: c354.33,2480.32 r140.75
  circle w10: c354.33,1062.99 r140.75
  circle w10: c354.33,0 r140.75
  circle w10: c708.66,1062.99 r140.75
  circle w10: c708.66,1417.32 r140.75
  circle w10: c708.66,1771.65 r140.75
  circle w10: c708.66,2125.98 r140.75
  circle w10: c708.66,2480.32 r140.75
  circle w10: c0,1062.99 r140.75
  circle w10: c0,0 r140.75
  circle w10: c0,2480.32 r140.75
  circle w10: c0,1771.65 r140.75
  circle w10: c0,2125.98 r140.75
  circle w10: c0,708.66 r140.75
  circle w10: c0,1417.32 r140.75
  circle w10: c0,354.33 r140.75
  circle w10: c1062.99,0 r140.75
  circle w10: c1062.99,354.33 r140.75
  circle w10: c1062.99,708.66 r140.75
  circle w10: c1062.99,1062.99 r140.75
  circle w10: c1062.99,1417.32 r140.75
  circle w10: c1062.99,1771.65 r140.75
  circle w10: c1062.99,2125.98 r140.75
  circle w10: c1062.99,2480.32 r140.75

## Text inside footprints (layer, text, board x,y; h text height)
U1_D1: Bottom Overlay "*" at 1202.16,2332.28 h50; Bottom Assembly "*" at 1144.16,2294.04 h50
U1_D2: Bottom Overlay "*" at 252.16,2297.28 h50; Bottom Assembly "*" at 194.16,2259.04 h50